# Altium PCB PCB1.PcbDoc
Units mil, origin at the board's own origin, x right, y up, seen from the top; angles counter-clockwise.
Board outline 2066.93 x 1476.38 mil, 2 copper layers (Top Layer, Bottom Layer); 7 components, 19 nets, 74 pads, 1 vias.
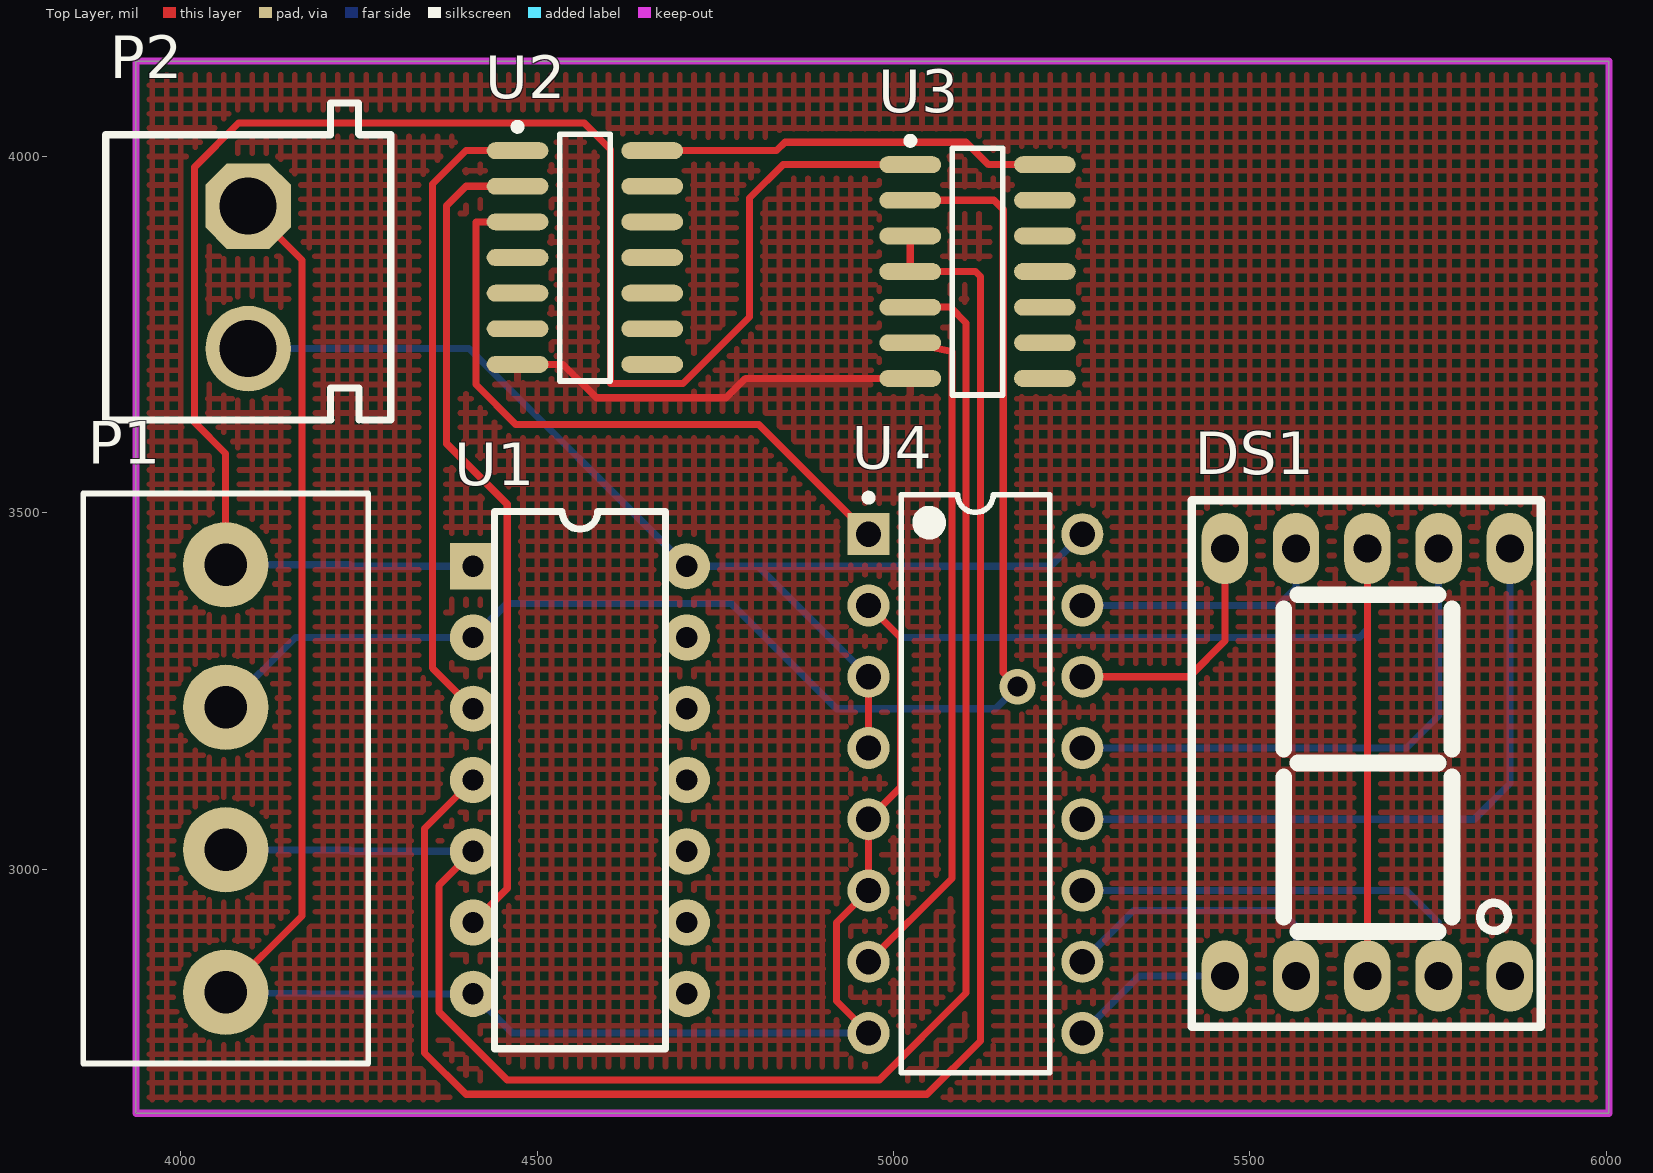
[diagram p0: Top Layer view]
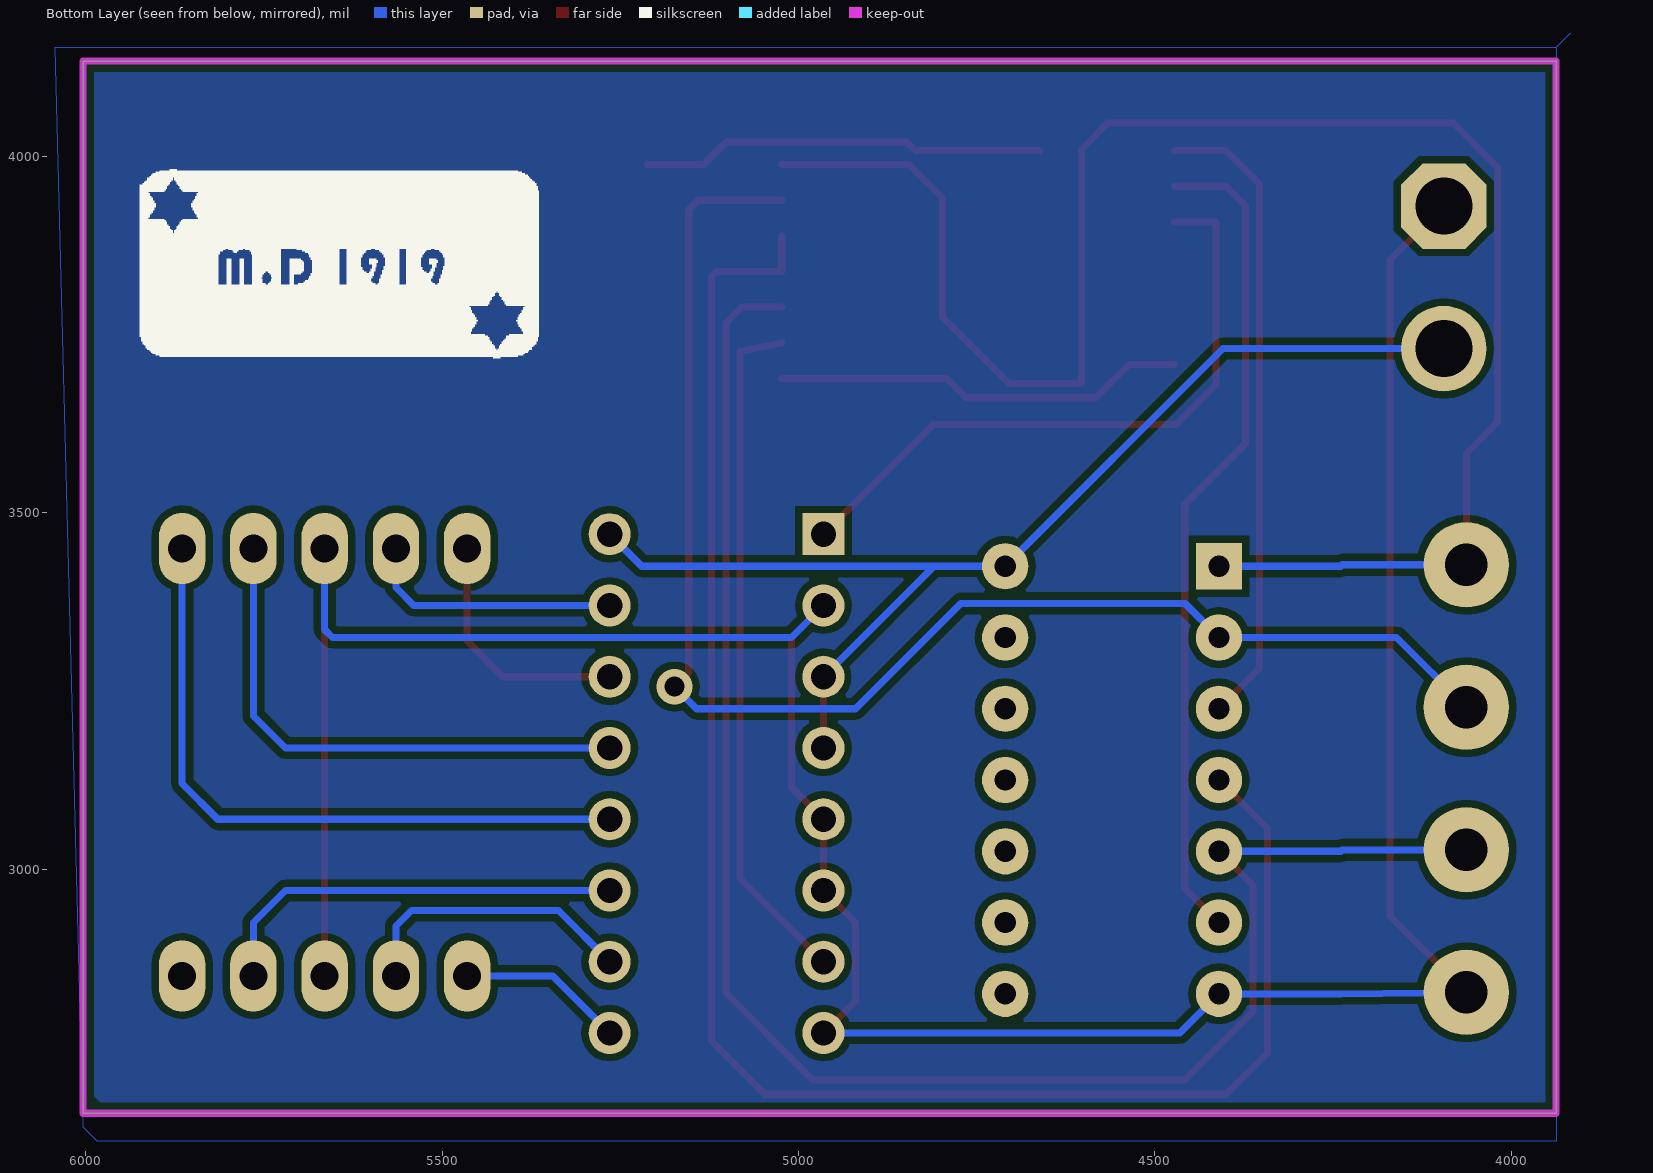
[diagram p1: Bottom Layer view, seen from below]

## Layer stack, top to bottom
Top Solder: solder mask 0.4, Solder Resist, Dk 3.5
Top Layer: signal copper 1.4
Dielectric1: dielectric 12.6, FR-4, Dk 4.8
Bottom Layer: signal copper 1.4
Bottom Solder: solder mask 0.4, Solder Resist, Dk 3.5

## Board outline
3937.01,2657.48 6003.94,2657.48 6003.94,4133.86 3937.01,4133.86

## Design rules (kind name [scope] priority, off if disabled: settings)
Clearance [All] p1: gap=10 ignorepadtopadclearanceinfootprint=FALSE except(0: Arc-Hole Track-Hole SMDPad-Hole THPad-Hole Via-Hole Fill-Hole Poly-Hole Region-Hole Text-Hole)
PolygonConnect [All] p1: connectstyle=Relief reliefconductorwidth=10 reliefentries=4 polygonreliefangle="90 Angle" airgapwidth=10
RoutingVias [All] p1: holewidth=28 width=50 viastyle="Through Hole" minholewidth=28 minwidth=50 maxholewidth=28 maxwidth=50
SolderMaskExpansion [All] p1: expansion=4 istentingtop=FALSE
Width [All] p1: maxlimit=10 minlimit=10 preferedwidth=10
30 further rules are at their usual default settings.

## Classes and differential pairs
component class Designator: DS1 U4

## Components (designator, comment, footprint, x,y, rotation, side; value= is the part's Value field where it differs from the comment)
DS1 "7Seg-Single" 7SEG-SINGLE 5660,3120 r0 top
P1 "Terminal 4PIN" "Terminal 4Pin" 4040,3135 r90 top
P2 "Terminal 2pin" "Terminal 2pin" 4095,3830 r270 top
U1 "SN7408" dip14 4560,3125 r0 top
U2 "DM74AS32M" M14A_N 4566.93,3858.27 r0 top
U3 "DM74ALS86M" M14A_N 5118.11,3838.58 r0 top
U4 "CD4511BCN" N16E 5115,3120 r0 top

## Footprints (in the part's own frame and the unit in brackets; to place one, negate y for a bottom-side part, rotate by r counter-clockwise, add the part's x,y. Pads: shape width x height; smd on the part's side, far side on the other; paste and mask are expansions set on the pad)
7SEG-SINGLE [mil]
  oval 65x100 hole 39.37: A(105,330) B(205,330) C(105,-270) COM(5,-270) COM(5,330) D(-95,-270) dp(205,-270) E(-195,-270) F(-95,330) G(-195,330)
  silkscreen extent -241,-341 248,398, body extent -244,-345 252,403, height 394
dip14 [mil]
  rect 65x65 hole 30: 1(-150,300)
  round 65 hole 30: 2(-150,200) 3(-150,100) 4(-150,0) 5(-150,-100) 6(-150,-200) 7(-150,-300) 8(150,-300) 9(150,-200) 10(150,-100) 11(150,0) 12(150,100) 13(150,200) 14(150,300)
  silkscreen extent -120,-377 120,377, body extent -155,-384 155,384, height 200
M14A_N [mm] "SOIC, 14-Leads, Body 8.6x3.9mm, Pitch 1.27mm, IPC Medium Density"
  oval 2.2x0.6 smd: 1(-2.4,3.81) 2(-2.4,2.54) 3(-2.4,1.27) 4(-2.4,0) 5(-2.4,-1.27) 6(-2.4,-2.54) 7(-2.4,-3.81) 8(2.4,-3.81) 9(2.4,-2.54) 10(2.4,-1.27) 11(2.4,0) 12(2.4,1.27) 13(2.4,2.54) 14(2.4,3.81)
  silkscreen extent -2.52,-4.4 0.9,4.78, body extent -2,-4.38 2,4.38, height 1.75
N16E [mm] "DIP, 16-Leads, Row Spacing 7.62mm, Pitch 2.54mm, Body 19.3x6.35mm"
  rect 1.5x1.5 hole 0.9: 1(-3.81,8.89)
  round 1.5 hole 0.9: 2(-3.81,6.35) 3(-3.81,3.81) 4(-3.81,1.27) 5(-3.81,-1.27) 6(-3.81,-3.81) 7(-3.81,-6.35) 8(-3.81,-8.89) 9(3.81,-8.89) 10(3.81,-6.35) 11(3.81,-3.81) 12(3.81,-1.27) 13(3.81,1.27) 14(3.81,3.81) 15(3.81,6.35) 16(3.81,8.89)
  silkscreen extent -3.93,-10.3 2.65,10.31, body extent -3.6,-10.28 3.6,10.28, height 5.08
"Terminal 2pin" [mil]
  oct 120x120 hole 80: 1(-100.5,-0.5)
  round 120 hole 80: 2(99.5,-0.5)
  silkscreen extent -245,-201 200,200, body extent -215,-154 199,150, height 413
"Terminal 4Pin" [mil]
  round 120 hole 60: 1(-307.92,-22.85) 2(-107.92,-22.85) 3(92.08,-22.85) 4(292.08,-22.85)
  silkscreen extent -408,-223 392,177, body extent -407,-174 404,129, height 394

## Part data
U1: "Quad 2 Input AND Gate"
U2: "Quad 2-Input OR Gate, 14-Pin SOIC"
U3: "Quad 2-Input XOR Gate, 14-Pin SOIC"
U4: "BCD-to-7 Segment Latch/Decoder/Driver"

## Via types
v1: diameter 50, hole 28, Top Layer to Bottom Layer, 1 vias

## Nets (pads, with @x,y where several pads share a name; then routed paths per layer and width w, separated by ;. In a path a pad name is that pad's centre, name@x,y a point inside that pad or via, vN(x,y) a via of type N, cw(c..) or ccw(c..) an arc to the next point about the centre after c; other vN are vias at no path point)
GND: U2.7 U3.7 | length 581.8
  Top Layer w10: U2.7 4536.3,3708.27 4583.11,3661.46 4764.98,3661.46 4792.11,3688.58 U3.7
NetDS1_A: DS1.A U4.13 | length 753.6
  Bottom Layer w10: U4.13 5720,3170 5765,3215 DS1.A
NetDS1_B: DS1.B U4.12 | length 950.7
  Bottom Layer w10: U4.12 5815,3070 5865,3120 DS1.B
NetDS1_C: DS1.C U4.11 | length 593.6
  Bottom Layer w10: U4.11 5720,2970 5765,2925 DS1.C
NetDS1_COM: DS1.COM P1.1 P2.1 U1.7 U4.2 U4.5 U4.6 U4.8 | length 4215.8
  Top Layer w10: P1.1 4170,2934.23 4170,3855 P2.1 ; U4.8 4920,2815 4920,2925 U4.6 U4.5 5010,3115 5010,3325 U4.2 ; DS1.COM@5665,2850 DS1.COM@5665,3450
  Bottom Layer w10: P1.1 4239.08,2825 U1.7 4465,2770 U4.8 ; U4.2 5010,3325 5654,3325 5665,3336 DS1.COM@5665,3450
NetDS1_D: DS1.D U4.10 | length 408.9
  Bottom Layer w10: U4.10 5337,2942 5543,2942 5565,2920 DS1.D
NetDS1_E: DS1.E U4.9 | length 233.1
  Bottom Layer w10: U4.9 5345,2850 DS1.E
NetDS1_F: DS1.F U4.15 | length 365.4
  Bottom Layer w10: U4.15 5540,3370 5565,3395 DS1.F
NetDS1_G: DS1.G U4.14 | length 350.7
  Top Layer w10: U4.14 5415,3270 5465,3320 DS1.G
NetP1_2: P1.2 U1.5 U3.5 | length 2451.3
  Top Layer w10: U1.5 4362,2977 4362,2800 4458,2704 4980,2704 5102,2826 5102,3766.58 5080,3788.58 U3.5
  Bottom Layer w10: P1.2 4237,3027.08 4239.08,3025 U1.5
NetP1_3: P1.3 U1.2 U3.2 | length 2059.4
  Top Layer w10: U3.2 5141,3938.58 5154,3925.58 5154,3276 v1(5174,3256)
  Bottom Layer w10: P1.3 4160.77,3325 U1.2 4458,3373 4772,3373 4920,3225 5143,3225 v1(5174,3256)
NetP1_4: P1.4 U1.1 U3.1 | length 2523.1
  Top Layer w10: P1.4 4062.85,3583.15 4019,3627 4019,3985 4081,4047 4566,4047 4603,4010 4603,3681.46 4704.46,3681.46 4798,3775 4798,3941.58 4845,3988.58 U3.1
  Bottom Layer w10: P1.4 4237,3427.08 4239.08,3425 U1.1
NetP2_2: P2.2 U1.14 U4.3 U4.4 U4.16 | length 1634.9
  Top Layer w10: U4.4 U4.3
  Bottom Layer w10: P2.2 4404.5,3730.5 U1.14 4810,3425 ; U4.3 4810,3425 ; U4.16 5220,3425 4810,3425
NetU1_3: U1.3 U2.1 | length 898.8
  Top Layer w10: U1.3 4353,3282 4353,3961.27 4400,4008.27 U2.1
NetU1_4: U1.4 U3.3 U3.4 | length 2470.1
  Top Layer w10: U1.4 4342,3057 4342,2742 4400,2684 5047,2684 5122,2759 5122,3831.58 5115,3838.58 U3.4 U3.3
NetU1_6: U1.6 U2.2 | length 1172
  Top Layer w10: U1.6 4458,2973 4458,3512 4373,3597 4373,3931.27 4400,3958.27 U2.2
NetU2_3: U2.3 U4.1 | length 924.7
  Top Layer w10: U2.3 4414,3908.27 4414,3680 4470,3624 4811,3624 U4.1
NetU3_6: U3.6 U4.7 | length 964.6
  Top Layer w10: U4.7 5082,2987 5082,3726.58 U3.6
VCC: U2.14 U3.14 | length 569.1
  Top Layer w10: U2.14 4836,4008.27 4847.73,4020 5102,4020 5133.42,3988.58 U3.14
pads on no net: DS1.dp U1.8 U1.9 U1.10 U1.11 U1.12 U1.13 U2.4 U2.5 U2.6 U2.8 U2.9 U2.10 U2.11 U2.12 U2.13 U3.8 U3.9 U3.10 U3.11 U3.12 U3.13

## Polygon pours and split planes (outlines as drawn)
GND on Top Layer "Keep-Out Layer-No Net" (hatched 90Degree grid 20 track 8, pour order 2): 6003.94,4133.86 3937.01,4133.86 3937.01,2637.8 3956.69,2657.48 6003.94,2657.48
no net on Bottom Layer "NONET_L02_P006" (solid, pour order 6): 3937.01,4153.54 6023.62,4153.54 6023.62,2716.54 5964.57,2657.48 3937.01,2657.48 3937.01,4153.54
GND on Bottom Layer "Keep-Out Layer-No Net" (solid, remove dead copper, pour order 5): 6043.31,4153.54 3937.01,4153.54 3917.32,4173.23 3937.01,4153.54 3937.01,2618.11 5984.25,2618.11 6003.94,2637.8

## Keep-outs
Keep-Out Layer:
  the board outline again, w10

## Silkscreen, mask and mechanical layers (free items; w line width, h text height)
Bottom Overlay:
  drawing of 449 lines, arcs and shapes, not listed